# Altium PCB PCB_Control.V03.R00.PcbDoc (part 3 of 7)
Units mm, origin at the board's own origin, x right, y up, seen from the top; angles counter-clockwise.
Board outline 188 x 90 mm, 6 copper layers (Top Layer, GND 1, PWR, Signal L4, GND 2, Bottom Layer), stack 1.548 mm thick; 541 components, 265 nets, 1491 pads, 2159 vias.
Unrouted connection lines stored in the file: 819.
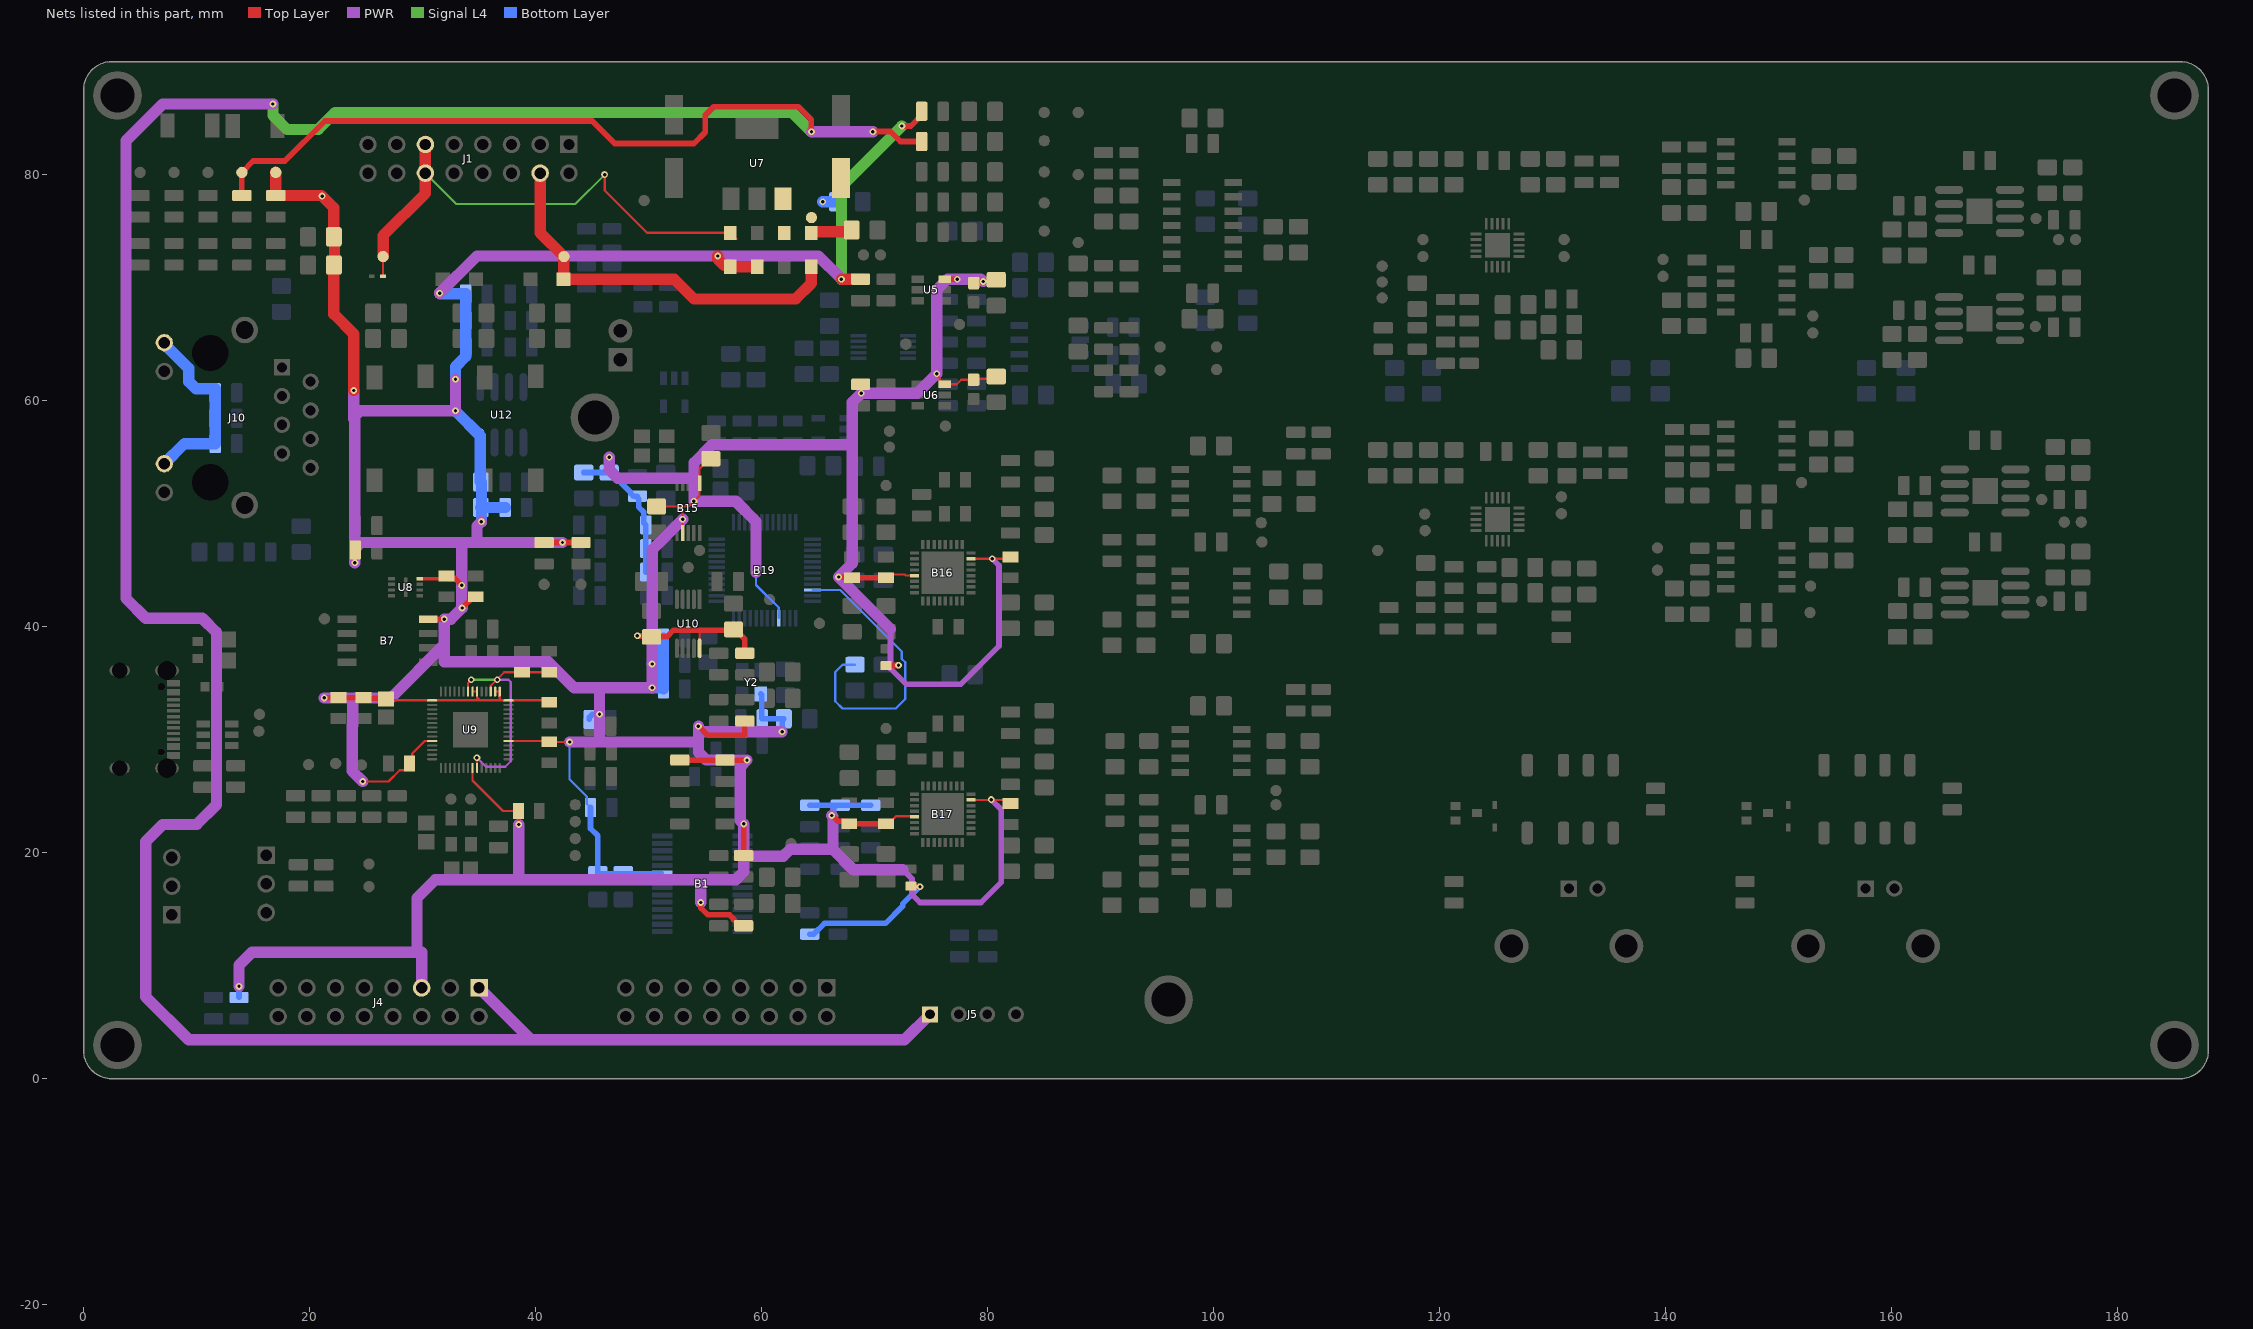
[diagram p6: the nets of this part, all layers, seen from the top]

## Part data (continued)
U10: library part CMP-00252-66526369-1, "SY55857LKG SY55857L Series 3.3 V 2.5 Gbps ANY INPUT-to-LVPECL Dual Translator - MSOP-10", Ambient Temperature Range High=85°C, Case/Package=MSOP, Frequency=2.5GHz, High Level Output Current=-50mA, Low Level Output Current=50mA, Max Supply Voltage=3.6V, Min Operating Temperature=-40°C, Min Supply Voltage=3V, Nominal Supply Current=28mA, Operating Supply Voltage=3.3V, Channel Type=Unidirectional, Data Rate=2.5Gbps, Height=920µm, Lead Free="Lead Free", Length=3mm, Lifecycle Status=Production, Logic Function=Translator, Max Operating Temperature=85°C, Mount="Surface Mount", NexarPartId=66526369, Number of Channels=2, Number of Circuits=1, Number of Inputs=1, Number of Outputs=1, Number of Pins=10, Packaging=Bulk, Propagation Delay=400ps, Radiation Hardening=No, REACH SVHC="No SVHC", Rise Time=200ps, RoHS=Compliant, Schedule B=8542320050, Termination=SMD/SMT, Turn-On Delay Time=400ps, Width=3mm
U11: library part CMP-04895-000044-1, "IC OP AMP GP RR 10MHZ 8-SOIC", Ambient Temperature Range High=+125°C, Ambient Temperature Range Low=-40°C, Input Bias Current=0.000005uA, Input Offset Voltage=0.025mV, Manufacturer="Texas Instruments", Max Dual Supply Voltage=18V, Max Junction Temp=+150°C, Max Supply Voltage=36V, Min Dual Supply Voltage=2.25V, Min Supply Voltage=4.5V, Nominal Supply Current=1mA, Output Current Per Channel=65mA, Package=D0008A, Temperature="-40°C to +125°C", Voltage Gain=134-143dB, Automotive=No, Category=IC, ComponentLink2Description=Datasheet, ComponentLink2URL=http://www.ti.com/lit/ds/symlink/opa2197.pdf, Device Class L1="Integrated Circuits (ICs)", Device Class L2="Linear ICs", Device Class L3="Amplifiers - Op Amps", Digikey Description="IC OP AMP GP RR 10MHZ 8-SOIC", Gain Bandwidth=10MHz, Height=1.75mm, Ipc Land Pattern Name=SOIC127P600X175-8, Lead Free=Yes, Manufacturer Part Number=OPA2197IDR, Number of Channels=2, Octopart=https://octopart.com/opa2197idr-texas+instruments-75179702, RoHS=TRUE, Standoff Height=0.11mm, Temperature Range High=+125°C, Temperature Range Low=-40°C
U12: library part CMP-0159-00340-1, "1 Mbit, 400kHz, 2.5V, 8-Pin SOIC 150mil, Extended Temperature, Tape and Reel", Code_IPC=SOIC127P600-8, Code_JEDEC=MS-012, DatasheetVersion="revF, Oct-2008", PackageDescription="8-Lead Plastic Small Outline (SN) - Narrow, 3.90mm Body [SOIC]", PackageReference=SOIC-SN8, PackageVersion="revBB, Aug-2009"
X1: "Crystal, 12 MHz, SMD, 3.2mm x 2.5mm, 30 ppm, 10 pF, 30 ppm, ABM8 Series", Manufacturer_Name=ABRACON, Mouser Part Number=815-ABM8-272-T3, Datasheet Link=https://abracon.com/datasheets/ABM8-272-T3.pdf, Geometry.Height=0.8mm, Manufacturer_Part_Number=ABM8-272-T3, Mouser Price/Stock=https://www.mouser.co.uk/ProductDetail/ABRACON/ABM8-272-T3?qs=QpmGXVUTftEj6miOiJBMxQ%3D%3D
Y1: library part CMP-27762-015306-1, "Crystal 25MHz ±30ppm (Tol) ±30ppm (Stability) 10pF FUND 60Ω 4-Pin SMD T/R", Case/Package=SMD/SMT, ESR (Equivalent Series Resistance)=60R, Frequency=25MHz, Frequency Stability=30ppm, Load Capacitance=10pF, Max Operating Temperature=70°C, Min Operating Temperature=-20°C, Package Quantity=3000, Frequency Tolerance=30ppm, Height=0.039inch, Length=0.126inch, Mount="Surface Mount", Number of Pins=4, Packaging="Tape and Reel", Series=ABM8G, Termination=SMD/SMT, Tolerance=30ppm, Width=2.5mm
Y2: "Crystal or Oscillator", Manufacturer_Name=ABRACON, Mouser Part Number=815-ASE25.000MHZLCT, Arrow Part Number=ASE-25.000MHZ-LC-T, Arrow Price/Stock=https://www.arrow.com/en/products/ase-25.000mhz-lc-t/abracon?utm_currency=USD&region=nac, Datasheet Link=https://abracon.com/Oscillators/ASEseries.pdf, Height=1.2mm, Manufacturer_Part_Number=ASE-25.000MHZ-LC-T, Mouser Price/Stock=https://www.mouser.co.uk/ProductDetail/ABRACON/ASE-25.000MHZ-LC-T?qs=ShQ8XZQtgRuW6p4KtHOZPQ%3D%3D

## Free pads (board coordinates)
  round 4.3 hole 3: 1(3,3) 1(3,87) 1(45.25,58.5) 1(96,7) 1(185,3) 1(185,87)

## Via types
v1: diameter 0.6, hole 0.3, Top Layer to Bottom Layer, tented both sides, 1686 vias
v2: diameter 0.6, hole 0.3, Top Layer to Bottom Layer, 448 vias
v3: diameter 0.5, hole 0.2, Top Layer to Bottom Layer, tented both sides, 16 vias
v4: diameter 0.6, hole 0.25, Top Layer to Bottom Layer, tented both sides, 9 vias

## Nets (pads, with @x,y where several pads share a name; then routed paths per layer and width w, separated by ;. In a path a pad name is that pad's centre, name@x,y a point inside that pad or via, vN(x,y) a via of type N, cw(c..) or ccw(c..) an arc to the next point about the centre after c; other vN are vias at no path point)
1V2O: B19.22 C199.2 | length 25.9
  Bottom Layer w0.2: B19.22@64.488,43.25 66.95,43.25 72.4,37.8 72.4,37.149 72.7,36.849 72.7,33.6 71.857,32.757 67.143,32.757 66.5,33.4 66.5,36 67.143,36.643 C199.2@68.25,36.643
+1V1: C81.1 C82.1 U9.23 U9.45 U9.50 | length 22.4
  Top Layer w0.2: U9.50@34.017,34.257 34.017,34.998 34.3,35.281 v1(34.3,35.3) ; v1(34.8,28.4) 34.817,28.383 U9.23@34.817,27.507 ; U9.45@36.017,34.257 36.017,34.773 37.219,35.975 C82.1@38.8,35.975 C81.1@41.2,35.975
  PWR w0.2: v1(34.8,28.4) 35.6,27.6 37.3,27.6 37.8,28.1 37.8,35.1 37.6,35.3 v1(36.6,35.3)
  Signal L4 w0.2: v1(34.3,35.3) v1(36.6,35.3)
+3V3: B1.9 B7.8 B15.1 B15.7 B16.5 B16.23 B17.5 B17.23 B19.28 C6.1 C7.1 C44.2 C45.2 C66.1 C67.A C68.1 C69.A C74.1 C75.1 C76.1 C77.1 C78.1 C79.1 C80.1 C83.2 C84.1 C137.2 C138.2 C139.1 C140.1 C141.1 C153.1 C154.1 C155.1 C171.2 C172.2 C180.2 C181.2 C189.2 C197.2 C198.2 D16.1 D18.1 FB2.1 FB7.1 J4.5 J10.9 J10.11 R1.2 R28.2 R29.2 R30.2 R34.2 R35.2 R36.2 R43.1 R47.2 R48.2 R49.2 R50.2 R59.2 R61.2 R68.1 R114.2 R115.2 R116.2 R117.2 R132.2 R133.2 R134.2 R135.2 R140.1 R146.1 R147.2 R148.2 R149.2 R150.2 R151.2 R154.1 R155.1 R167.1 R177.2 R178.2 TP7.1 U5.3 U6.3 U8.8 U9.1 U9.10 U9.22 U9.33 U9.42 U9.43 U9.44 U9.48 U9.49 U10.10 U12.8 Y2.4 | length 695.8
  Top Layer w0.2: v1(24.7,26.3) 26.974,26.3 27.974,27.3 28.45,27.3 28.825,27.675 C76.1@28.825,27.9 29.083,28.158 29.083,28.783 30.182,29.882 U9.10@30.842,29.882 ; C83.2@26.758,33.612 26.888,33.482 U9.1@30.842,33.482 35.076,33.482 ; U9.22@34.417,27.507 34.417,26.383 37.1,23.7 C80.1@38.475,23.7 38.5,23.675 v1(38.5,22.5) ; U9.49@34.417,34.257 U9.48@34.817,34.257 34.817,33.741 35.076,33.482 ; U9.44@36.417,34.257 U9.43@36.817,34.257 36.817,33.483 36.818,33.482 ; U9.33@37.592,29.882 41.143,29.882 C79.1@41.2,29.825 41.225,29.8 v1(43,29.8) ; C84.1@41.2,33.325 41.043,33.482 U9.42@37.592,33.482 36.818,33.482 ; C138.2@50.7,50.643 52.657,50.643 ; B15.7@53,48.3 v1(53,49.5) 53,50.3 52.657,50.643 ; U10.10@54.5,38.084 54.5,39.7 ; C137.2@55.5,54.857 55.372,54.857 54.5,53.985 B15.1@54.5,52.7 54.5,51.59 54.01,51.1 v1(54,51.1) 53.543,50.643 52.657,50.643 ; C171.2@57,39.7 57.443,39.7 C171.2@57.5,39.757 ; R61.2@68.75,61.45 68.8,61.4 v1(68.8,60.65) ; C153.1@71,22.575 71.315,22.575 71.315,22.665 71.875,23.225 73.45,23.225 B17.5@73.5,23.175 ; C139.1@71,44.325 71.292,44.617 72.148,44.617 72.151,44.621 72.649,44.621 72.749,44.521 B16.5@73.5,44.521 ; v1(75.478,62.375) 75.478,62.267 75.75,61.995 75.75,61.675 75.975,61.45 U6.3@76.2,61.45 U6.3@76.45,61.45 ; U6.3@76.5,61.5 U6.3@76.45,61.45 ; B17.23@78.5,24.675 81.675,24.675 C155.1@82,24.35 ; B16.23@78.5,46.021 v1(80.4,46.021) 81.846,46.021 C141.1@82,46.175 ; C68.1@80.75,62.143 80.554,61.946 78.847,61.946 C69.A@78.75,61.85 77.65,61.85 77.25,61.45 U6.3@76.45,61.45 ; 35.076,33.482 36.817,33.482
  Top Layer w0.3: U8.8@29.75,44.25 31.86,44.25 C77.1@32.1,44.49 ; C66.1@80.457,70.4 80.604,70.546 C66.1@80.75,70.693
  Top Layer w0.5: v1(21.3,33.7) 21.319,33.719 22.539,33.719 C75.1@22.558,33.737 22.57,33.725 24.746,33.725 C74.1@24.758,33.737 24.832,33.662 26.707,33.662 C83.2@26.758,33.612 ; C7.1@22.143,72 22.143,73.25 ; v1(24,45.65) 24.019,45.669 24.019,46.769 R68.1@24.05,46.8 ; B7.8@30.5,40.67 v1(31.9,40.67) ; C77.1@32.1,44.49 32.325,44.265 32.85,44.265 v1(33.458,43.658) ; v1(33.49,41.655) 34.475,42.64 C78.1@34.588,42.64 ; R48.2@40.75,47.45 v1(42.375,47.45) R47.2@44,47.45 ; v1(49,39.2) 49.019,39.181 50.176,39.181 C172.2@50.25,39.107 51.607,39.107 52.2,39.7 54.5,39.7 C171.2@57,39.7 ; R49.2@52.75,28.2 R50.2@56.75,28.2 ; v1(54.4,31.2) 55.2,30.4 58.5,30.4 R115.2@58.5,31.65 ; v1(54.6,15.6) 54.619,15.581 54.619,15.118 55.237,14.5 57.163,14.5 57.5,14.163 57.5,14.1 58.05,13.55 R117.2@58.4,13.55 ; R50.2@57.1,28.2 v1(58.7,28.2) ; C171.2@57.5,39.757 57.65,39.757 58.5,38.907 R114.2@58.5,37.75 ; R116.2@58.4,19.75 v1(58.4,22.55) ; v1(66.2,23.3) 66.227,23.3 66.727,22.8 67.525,22.8 C154.1@67.75,22.575 C153.1@71,22.575 ; v1(66.8,44.4) 66.819,44.381 67.944,44.381 C140.1@68,44.325 C139.1@71,44.325 ; R177.2@71,36.55 71.021,36.571 72.081,36.571 v1(72.1,36.59) ; v1(72.4,84.3) 73.2,84.3 74.15,85.25 FB2.1@74.15,85.6 ; R178.2@73.2,17.05 73.231,17.019 73.981,17.019 v1(74,17) ; U5.3@76.2,70.75 v1(77.3,70.75) ; C67.A@78.75,70.4 78.897,70.546 v1@79.75,70.546 ; v1(79.6,70.546) v1@79.75,70.546 ; C66.1@80.604,70.546 v1@79.75,70.546
  Top Layer w1: TP7.1@17,80.2 R1.2@17,78.15 21.05,78.15 v1(21.1,78.1) 22.143,77.057 22.143,74.557 22.2,74.5 22.2,72.057 C7.1@22.143,72 22.143,67.657 23.9,65.9 v1(23.9,60.9) ; v1(56.1,72.8) 56.1,72.556 56.686,71.97 57.167,71.97 57.227,71.91 D16.1@57.227,71.85 D18.1@59.61,71.85 ; v1(67.05,70.75) R59.2@68.75,70.75
  PWR w0.5: v1(49,39.2) 49.019,39.181 50.3,39.181 ; 71.4,39.8 71.4,36.6 ; v1(72.1,36.59) 72.09,36.6 71.4,36.6 ; 72.5,18.5 73.3,17.7 73.3,17 ; v1(74,17) 73.3,17 ; v1(80.3,24.7) 81.2,23.8 81.2,17.4 79.4,15.6 74,15.6 73.3,16.3 73.3,17 ; v1(80.4,46.021) 81,45.421 81,38.3 77.6,34.9 72.8,34.9 71.4,36.3 71.4,36.6
  PWR w0.7: 24,58.4 24.7,59.1
  PWR w1: v1(13.75,8.175) 13.75,10.05 14.9,11.2 29.5,11.2 29.5,16 31.1,17.6 38.5,17.6 ; v1(21.3,33.7) 23.8,33.7 ; 23.9,58.4 23.9,59.3 ; v1(23.9,60.9) 23.9,59.3 ; v1(24,45.65) 24,46.9 ; 24,58.4 24,46.9 ; v1(24.7,26.3) 23.758,27.242 23.758,31.226 23.8,31.269 23.8,33.7 ; J4.5@29.91,8.05 29.91,11.2 ; v1(31.5,69.5) 34.8,72.8 v1(56.1,72.8) 65,72.8 v1(67.05,70.75) ; v1(32.9,61.9) v1(32.9,59.1) 24.7,59.1 24.1,59.1 23.9,59.3 ; v1@33.458,41.687 v1(33.458,43.658) 33.458,47.45 ; v1(33.49,41.655) 32.505,40.67 v1(31.9,40.67) 31.9,38.4 ; v1(35.2,49.3) 34.8,48.9 34.8,47.45 ; v1(38.5,22.5) 38.5,17.6 ; v1(42.375,47.45) 34.8,47.45 ; v1(43,29.8) 45.65,29.8 ; v1(46.5,55) 46.5,53.9 47.254,53.146 54,53.146 ; v1(53,49.5) 50.3,46.8 50.3,39.181 v1(50.3,34.6) 45.65,34.6 ; v1(54.4,31.2) 54.4,30.7 ; v1(54.6,15.6) 54.6,17.6 ; v1(59.5,44.8) 59.5,49.3 57.7,51.1 v1(54,51.1) 54,53.146 ; v1(61.8,30.7) 54.4,30.7 ; v1(66.2,23.3) 66.3,23.2 66.3,20.3 ; 71.4,39.8 v1(66.8,44.4) 68,45.6 68,56.1 ; 72.5,18.5 68.1,18.5 66.3,20.3 ; v1(79.6,70.546) 79.397,70.75 v1(77.3,70.75) 76.45,70.75 75.478,69.778 v1(75.478,62.375) 73.753,60.65 v1(68.8,60.65) 68,59.85 68,56.1 ; 23.8,33.7 27.2,33.7 31.9,38.4 ; 24,46.9 24.55,47.45 33.458,47.45 ; 31.9,38.4 31.9,36.9 41.1,36.9 43.4,34.6 45.65,34.6 ; 33.458,47.45 34.8,47.45 ; 38.5,17.6 54.6,17.6 ; 45.65,29.8 v1(45.65,32.264) 45.65,34.6 ; 45.65,29.8 54.4,29.8 ; 54,53.146 54,54.5 55.6,56.1 68,56.1 ; 54.4,29.8 54.4,30.7 ; 54.4,29.8 54.4,28.9 55.1,28.2 v1(58.7,28.2) 58.1,27.6 58.1,22.85 v1(58.4,22.55) 58.4,19.7 ; 54.6,17.6 57.7,17.6 58.4,18.3 58.4,19.7 ; 58.4,19.7 61.9,19.7 62.5,20.3 66.3,20.3
  Signal L4 w1: v1(67.05,70.75) 67.05,78.95 v1(72.4,84.3)
  Bottom Layer w0.2: v1(43,29.8) 43,26.499 44.524,24.975 44.524,24.326 R34.2@44.85,24 ; v1(59.5,44.8) 59.5,43.7 61.5,41.7 B19.28@61.5,40.762
  Bottom Layer w0.3: C44.2@47.75,18.143 47.832,18.225 B1.9@51.2,18.225
  Bottom Layer w0.5: R43.1@13.75,7.2 v1(13.75,8.175) ; U12.8@35.095,56.3 U12.8@35.095,56.408 ; C198.2@44.25,53.643 C189.2@46.5,53.643 ; R35.2@44.75,31.8 44.75,31.995 45,32.245 45.631,32.245 v1(45.65,32.264) ; R34.2@44.85,24 44.85,22.15 45.5,21.5 C45.2@45.5,18.143 C44.2@47.75,18.143 ; v1(46.5,55) C189.2@46.5,53.643 ; R146.1@49.75,44.833 R147.2@49.75,46.917 R148.2@49.75,49 49.556,49.194 49.556,50.144 49.107,50.593 49.107,51.3 49,51.407 FB7.1@49,51.55 48.65,51.55 48.4,51.8 48.4,51.893 46.65,53.643 C189.2@46.5,53.643 ; R154.1@51.219,34.581 R154.1@51.3,34.5 ; Y2.4@59.925,34.05 59.988,33.987 59.988,31.912 R167.1@60.05,31.85 C197.2@61.957,31.85 61.819,31.712 61.819,30.719 v1(61.8,30.7) ; R36.2@64.25,12.8 64.6,12.8 65.55,13.75 70.95,13.75 72.465,15.265 72.465,15.465 v1(74,17) ; R28.2@64.25,24.2 R29.2@66.6,24.2 ; v1(66.2,23.3) 66.2,23.327 66.35,23.477 66.35,23.95 R29.2@66.6,24.2 ; R30.2@69.65,24.2 R29.2@66.95,24.2 R29.2@66.6,24.2
  Bottom Layer w1: J10.11@7.14,54.42 8.92,56.2 R150.2@11.65,56.2 R151.2@11.65,58.45 R149.2@11.65,60.7 11.65,61.05 9.936,61.05 9.3,61.686 9.3,62.857 7.14,65.017 J10.9@7.14,65.13 ; v1(31.5,69.5) 31.55,69.45 R135.2@33.8,69.45 R134.2@33.8,67.1 R133.2@33.8,64.75 33.8,63.9 32.9,63 v1(32.9,61.9) 32.9,59.095 35.095,56.9 U12.8@35.095,56.3 C180.2@35.095,52.848 ; C181.2@35.143,50.55 R132.2@37.3,50.55 ; v1(35.2,49.3) C180.2@35.2,52.8 ; v1(50.3,34.6) 51.3,34.6 R154.1@51.3,34.5 ; v1(50.3,36.7) R155.1@51.3,36.7 ; R154.1@51.219,34.581 51.3,34.662 R155.1@51.3,36.7 ; R140.1@51.3,39 R155.1@51.3,36.7
+3V3_CONN: D1.1 D16.2 J1.11 J1.12 TP4.1 | length 46.1
  Top Layer w0.2: D1.1@26.5,71 TP4.1@26.5,72.75 ; v1(46.1,80) 46.1,78.6 49.85,74.85 D16.2@57.227,74.85 57.227,74.79 57.687,74.33 D16.2@57.747,74.33
  Top Layer w1: TP4.1@26.5,72.75 26.5,74.6 30.24,78.34 J1.12@30.24,80.13 J1.11@30.24,82.67
  Signal L4 w0.2: J1.12@30.24,80.13 32.97,77.4 43.5,77.4 v1(46.1,80)
+5V: C1.1 C2.1 C70.1 D15.1 D17.1 FB1.1 J4.1 J5.1 R2.2 TP8.1 TP52.1 U7.3 | length 303.6
  Top Layer w0.5: R2.2@14,78.15 TP8.1@14,80.2 15,81.2 17.8,81.2 21.35,84.75 45,84.75 47,82.75 54,82.75 55,83.75 55,85.25 55.75,86 63.25,86 64.381,84.869 64.381,83.819 v1(64.4,83.8) ; v1(69.837,83.8) 69.856,83.819 71.381,83.819 72.275,82.925 FB1.1@74.15,82.925
  Top Layer w1: D15.1@64.377,74.85 64.377,74.886 64.437,74.946 67.803,74.946 C1.1@67.957,75.1
  PWR w1: v1(16.75,86.25) 7,86.25 3.75,83 3.75,42.5 5.5,40.75 10.5,40.75 11.75,39.5 11.75,24.25 10,22.5 7,22.5 5.5,21 5.5,7.25 9.3,3.45 39.59,3.45 ; J4.1@34.99,8.05 39.59,3.45 ; v1(64.4,83.8) v1(69.837,83.8) ; J5.1@74.88,5.7 72.63,3.45 39.59,3.45
  Signal L4 w1: v1(16.75,86.25) 16.75,85.25 18,84 20.75,84 22.25,85.5 62.7,85.5 v1(64.4,83.8)
  Bottom Layer w1: v1(65.4,77.6) C2.1@66.657,77.6
+5V_CONN: D2.1 D15.2 J1.4 TP3.1 | length 34.9
  Top Layer w0.5: TP3.1@42.488,72.737 TP3.1@42.5,72.75
  Top Layer w1: J1.4@40.4,80.13 40.4,74.85 TP3.1@42.5,72.75 ; TP3.1@42.488,72.737 42.475,72.725 D2.1@42.475,70.75 52.25,70.75 54,69 63,69 64.377,70.377 D15.2@64.377,71.85